# Altium PCB Rectifer.PcbDoc
Units mil, origin at the board's own origin, x right, y up, seen from the top; angles counter-clockwise.
Board outline 5250.03 x 3710.82 mil, 2 copper layers (Top Layer, Bottom Layer); 29 components, 18 nets, 77 pads, 1 vias.
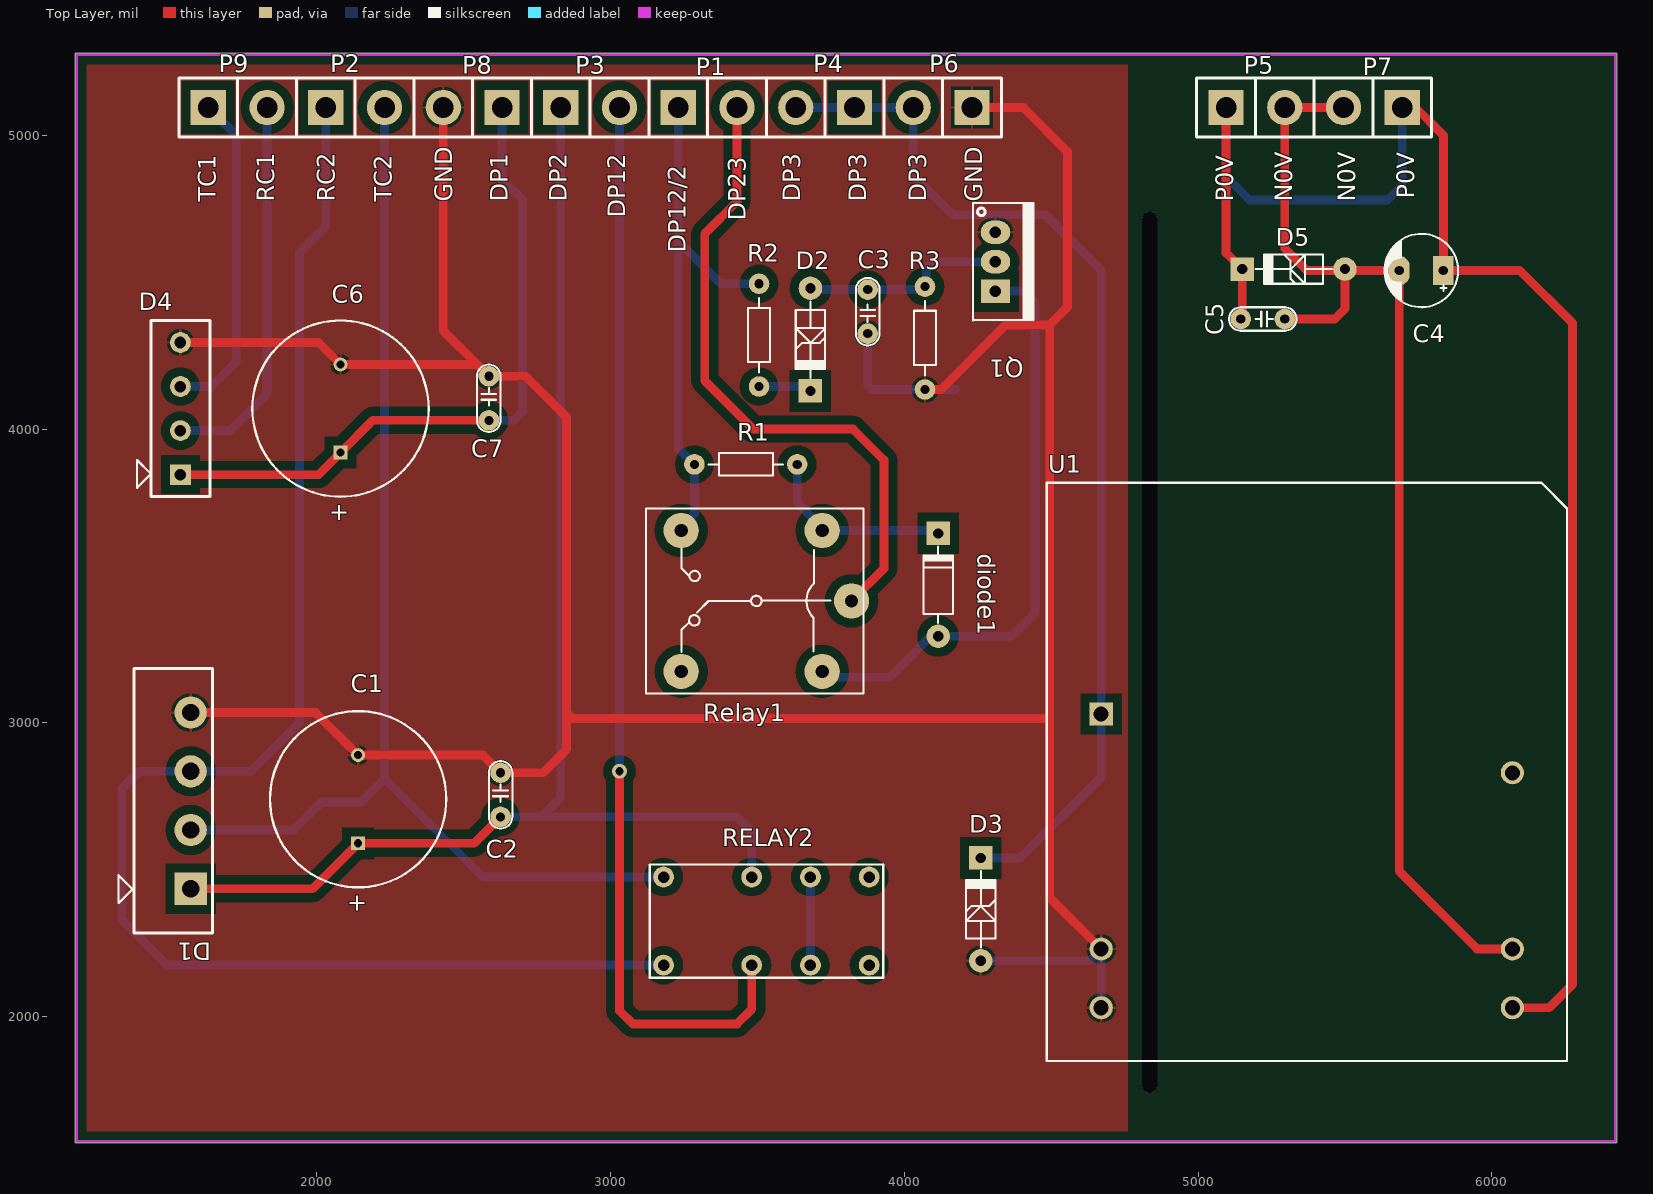
[diagram p0: Top Layer view]
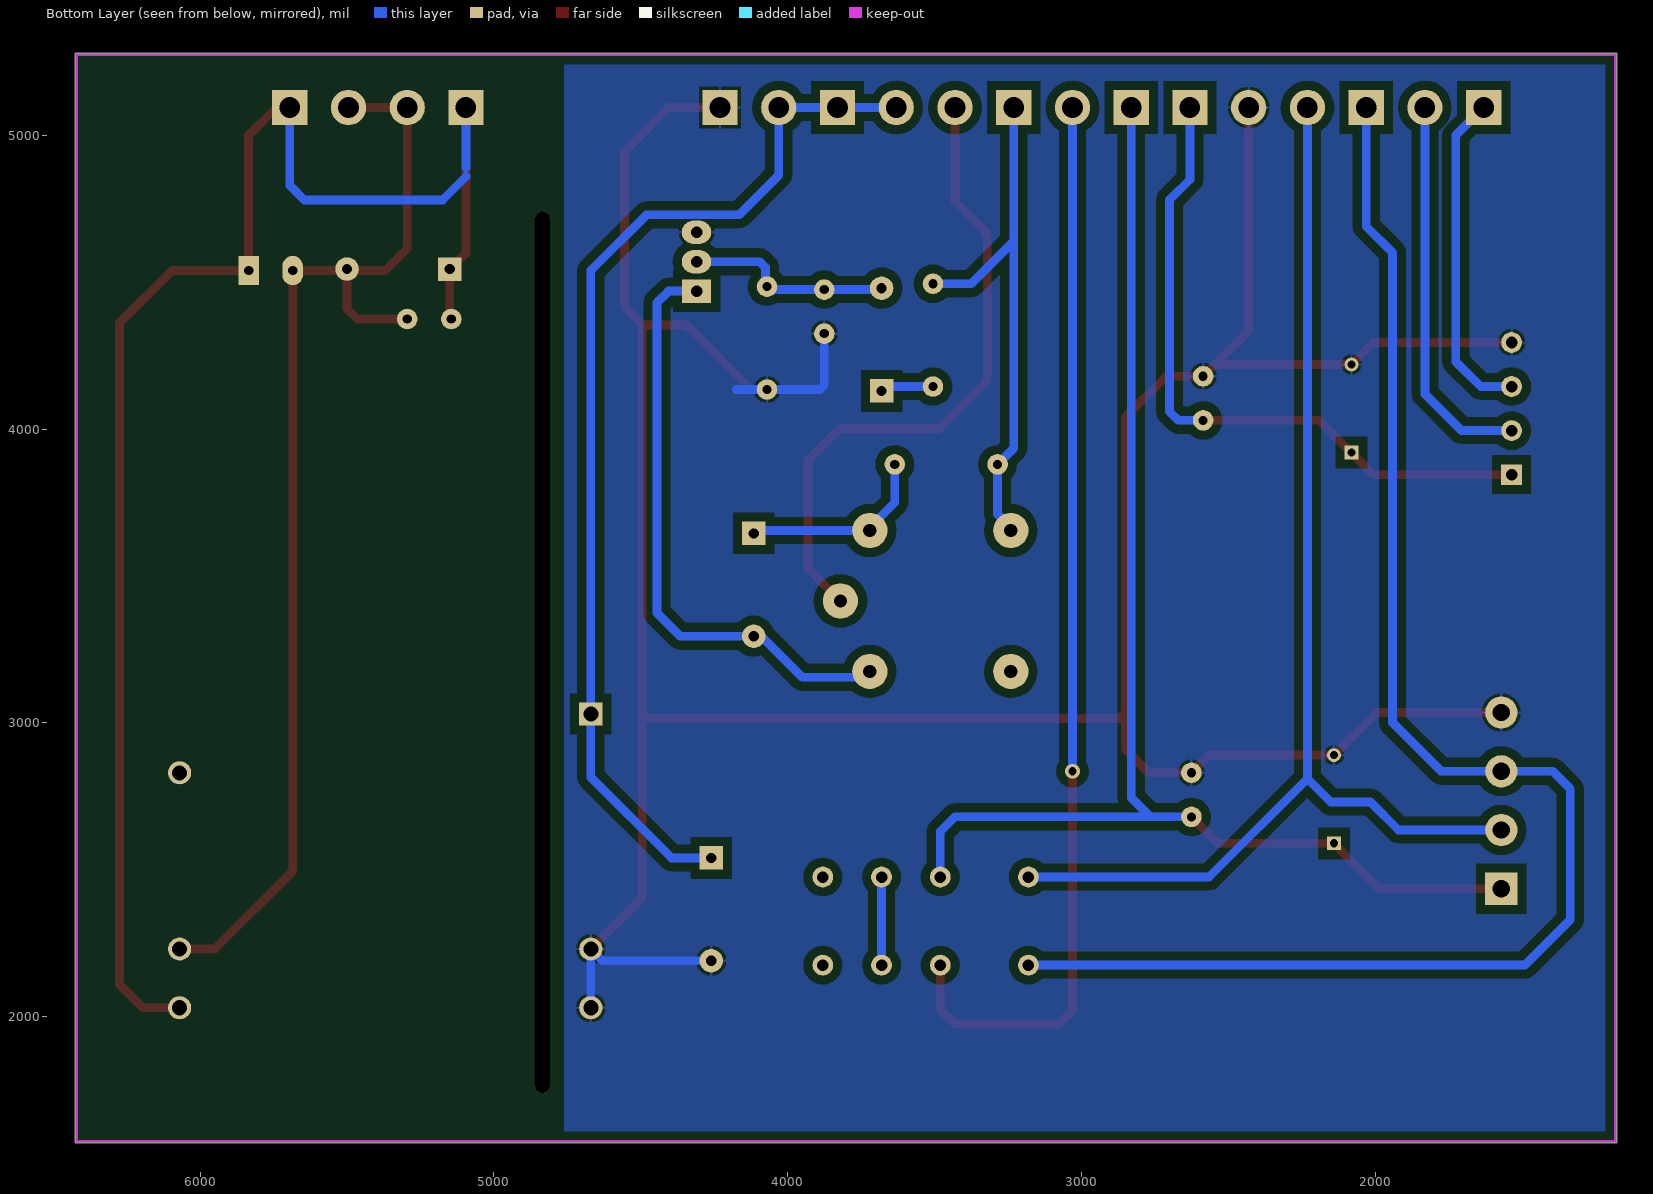
[diagram p1: Bottom Layer view, seen from below]

## Layer stack, top to bottom
Top Solder: solder mask 0.4, Solder Resist, Dk 3.5
Top Layer: signal copper 1.4
Dielectric 1: dielectric 12.6, FR-4, Dk 4.8
Bottom Layer: signal copper 1.4
Bottom Solder: solder mask 0.4, Solder Resist, Dk 3.5

## Board outline
1181.1,1569.79 cw(c1181.1,1574.8) 1176.09,1574.8 1176.09,5275.59 cw(c1181.1,5275.59) 1181.1,5280.61 6417.32,5280.61 cw(c6417.32,5275.59) 6419.21,5280.24 cw(c6421.1,5275.59) 6426.12,5275.59 6426.12,1574.8 cw(c6421.1,1574.8) 6419.21,1570.16 cw(c6417.32,1574.8) 6417.32,1569.79

## Design rules (kind name [scope] priority, off if disabled: settings)
Clearance [All] p1: gap=30
PolygonConnect [All] p1: connectstyle=Relief reliefconductorwidth=10 reliefentries=4 polygonreliefangle="90 Angle" airgapwidth=10
RoutingVias [All] p1: holewidth=28 width=50 viastyle="Through Hole" minholewidth=28 minwidth=50 maxholewidth=28 maxwidth=50
SolderMaskExpansion [All] p1: expansion=4
Width [All] p1: maxlimit=100 minlimit=10 preferedwidth=30
30 further rules are at their usual default settings.

## Components (designator, comment, footprint, x,y, rotation, side; value= is the part's Value field where it differs from the comment)
C1 "1000uF/25" RB7.6-15 2140,2740 r270 top
C2 "104" CN1.5 2625,2760 r270 top
C3 "104" CN1.5 3875,4395 r90 top
C4 "100uF/25" CP1.5/2.5 5835,4540 r180 top
C5 "104" CN1.5 5225,4375 r180 top
C6 "1000uF/25" RB7.6-15 2080,4070 r270 top
C7 "104" CN1.5 2585,4110 r270 top
D1 "Bridge2" KBU1010 1570,2435 r270 top
D2 "D Zener" DZ1A 3680,4480 r90 top
D3 "D Zener" DZ1A 4260,2190 r270 top
D4 "Bridge2" KBP206 1535,3845 r90 top
D5 "15V" DZ1A 5500,4545 r0 top
diode1 "Diode" D1A 4115,3295 r270 top
P1 "Header 2" "CON2 5.08" 3230,5095 r0 top
P2 "Header 2" "CON2 5.08" 2030,5095 r0 top
P3 "Header 2" "CON2 5.08" 2830,5095 r0 top
P4 "Header 2" "CON2 5.08" 3830,5095 r180 top
P5 "Header 2" "CON2 5.08" 5095,5095 r0 top
P6 "Header 2" "CON2 5.08" 4230,5095 r180 top
P7 "Header 2" "CON2 5.08" 5695,5095 r180 top
P8 "Header 2" "CON2 5.08" 2630,5095 r180 top
P9 "Header 2" "CON2 5.08" 1630,5095 r0 top
Q1 "MOSFET-N" QTO-220A 4310,4570 r270 top
R1 "Res1" R1/4W 3285,3880 r0 top
R2 "Res1" R1/4W 3505,4145 r90 top
R3 "Res1" R1/4W 4070,4135 r90 top
Relay1 "relay" RL_SPDT_10A 3820,3415 r180 top
RELAY2 "RY12W-K" RY-Series 3180,2175 r0 top
U1 "PP15" PP15 4670,3030 r0 top

## Footprints (in the part's own frame and the unit in brackets; to place one, negate y for a bottom-side part, rotate by r counter-clockwise, add the part's x,y. Pads: shape width x height; smd on the part's side, far side on the other; paste and mask are expansions set on the pad)
CN1.5 [mil]
  round 70 hole 31: 1(-70,0) 2(80,0)
  silkscreen extent -110,-40 120,40, body extent -110,-33 120,33, height 235
"CON2 5.08" [mil]
  rect 120x120 hole 70: 1(0,0)
  round 120 hole 70: 2(200,0)
  silkscreen extent -100,-100 300,100
CP1.5/2.5 [mil] "Tu hoa 33 >100 uF,50V, 220uF/16V,25V ( it su dung )"
  rect 70x100 hole 32: 1(0,0)
  oval 70x100 hole 32: 2(150,0)
  silkscreen extent -50,-125 200,125, body extent -46,-121 202,127, height 434
D1A [mil] "Diode 1A, W 100mil, L 350mil"
  round 80 hole 35: 1(0,0)
  rect 80x80 hole 35: 2(-350,0)
  silkscreen extent -305,-50 -45,50, body extent -386,-33 34,36, height 84
DZ1A [mil] "Diode 1A, W 100mil, L 350mil"
  round 80 hole 35: 1(0,0)
  rect 80x80 hole 35: 2(-350,0)
  silkscreen extent -305,-50 -45,50, body extent -346,-65 -15,40, height 121
KBP206 [mm]
  rect 1.8x1.8 hole 1: 1(0,0)
  round 1.8 hole 1: 2(3.81,0) 3(7.62,0) 4(11.43,0)
  silkscreen extent -1.91,-2.54 13.33,3.76, body extent -1.91,-2.54 13.31,2.54, height 12
KBU1010 [mil] "Bridge rectifier 10A"
  rect 110x110 hole 59.06: 1(0,0)
  round 110 hole 59.06: 2(-200,0) 3(-400,0) 4(-600,0)
  silkscreen extent -750,-246 150,75, body extent -750,-193 151,75, height 748
PP15 [mm]
  rect 2x2 hole 1.3: 1(0,0)
  round 2 hole 1.3: 2(0,-20.32) 3(0,-25.4) 4(35.56,-25.4) 5(35.56,-20.32) 6(35.56,-5.08)
  silkscreen extent -4.72,-30 40.28,20, body extent -4.14,-29.91 40.92,20.05, height 8
QTO-220A [mil] "TO-220 - 3-2-1"
  rect 80x100 hole 39: 1(100,0)
  oval 80x100 hole 39: 2(0,0) 3(-100,0)
  silkscreen extent -200,-76 200,131, body extent -195,-81 195,96, height 760
R1/4W [mil] "R 1/4W, 2 Pin, 350mil"
  round 70 hole 31: 1(0,0) 2(350,0)
  silkscreen extent 48,-38 302,38, body extent -40,-47 386,47, height 111
RB7.6-15 [mm] "Polarized Capacitor (Radial); 2 Leads"
  rect 1.2x1.2 hole 0.7: 1(3.81,0)
  round 1.2 hole 0.7: 2(-3.81,0)
  silkscreen extent -7.62,-7.62 7.62,7.62
RL_SPDT_10A [mil] "Relay SPDT, 5 pin, 10A,W 650mil, L 800mil, H 800mil"
  round 120 hole 45: 1(0,0) 2(580,240) 3(580,-240) 4(100,-240) 5(100,240)
  silkscreen extent -40,-315 700,315
RY-Series [mm]
  round 1.8 hole 1: 1(0,0) 2(7.62,0) 3(12.7,0) 4(17.78,0) 5(17.78,7.62) 6(12.7,7.62) 7(7.62,7.62) 8(0,7.62)
  silkscreen extent -1.2,-1.09 19,8.71, body extent -1.16,-1.04 19.06,8.76, height 12.5

## Part data
C1 C4 C6: library part "Cap Pol1", "Polarized Capacitor (Radial)"
C2 C3 C5 C7: library part Cap, "Capacitor"
D1 D4: "Diode Bridge"
D2 D3: "Zener Diode"
D5: library part "D Zener", "Zener Diode"
P1 P2 P3 P4 P5 P6 P7 P8 P9: "Header, 2-Pin"
Q1: "N-Channel MOSFET"
R1 R2 R3: "Resistor"
Relay1: library part Relay, "SPDT Relay"

## Free pads (board coordinates)
  oval 50x3000 hole 50 slot 3000 at 90 deg unplated: 2(4835,3240)

## Via types
v1: diameter 50, hole 28, Top Layer to Bottom Layer, 1 vias

## Nets (pads, with @x,y where several pads share a name; then routed paths per layer and width w, separated by ;. In a path a pad name is that pad's centre, name@x,y a point inside that pad or via, vN(x,y) a via of type N, cw(c..) or ccw(c..) an arc to the next point about the centre after c; other vN are vias at no path point)
DP1: C6.1 C7.2 D4.1 P8.1 | length 2318.1
  Top Layer w30: D4.1 2005,3845 C6.1 2190,4030 C7.2
  Bottom Layer w30: C7.2 2670,4030 2700,4060 2700,4780 2630,4850 P8.1
DP2: C1.1 C2.2 D1.1 P3.1 RELAY2.7 | length 4629.1
  Top Layer w30: D1.1 1985,2435 C1.1 2535,2590 C2.2
  Bottom Layer w30: C2.2 2765,2680 ; P3.1 2830,2745 2765,2680 ; RELAY2.7 3480,2630 3430,2680 2765,2680
DP3: D3.2 P4.1 P4.2 P6.2 U1.1 | length 3653.5
  Bottom Layer w30: P4.2 P4.1 P6.2 4030,4865 4165,4730 4480,4730 4670,4540 U1.1 4670,2815 4395,2540 D3.2
DP12: P3.2 RELAY2.2 | length 3714.4
  Top Layer w30: v1(3030,2835) 3030,2020 3075,1975 3430,1975 3480,2025 RELAY2.2
  Bottom Layer w30: v1(3030,2835) P3.2
DP12/2: P1.1 R1.1 R2.2 Relay1.3 | length 1820.6
  Bottom Layer w30: Relay1.3@3230,3655 3285,3710 R1.1 3230,3935 3230,3970 3230,4565 3230,4640 ; P1.1 3230,4640 ; R2.2 3375,4495 3230,4640
DP23: P1.2 Relay1.1 | length 2223
  Top Layer w30: P1.2 3430,4775 3320,4665 3320,4165 3485,4000 3825,4000 3930,3895 3930,3525 Relay1.1
GND: C1.2 C2.1 C3.1 C6.2 C7.1 D1.4 D3.1 D4.4 P6.1 P8.2 Q1.3 R3.1 U1.2 U1.3 | length 11348
  Top Layer w30: D4.4 2005,4295 C6.2 2545,4220 ; D1.4 1995,3035 C1.2 2565,2890 C2.1 2770,2830 2850,2910 2850,3035 ; P8.2 2430,4335 2545,4220 ; R3.1 4125,4135 4345,4355 4495,4355 ; P6.1 4405,5095 4555,4945 4555,4415 4495,4355 ; U1.2 4495,2405 4495,3015 ; 2545,4220 C7.1 2710,4180 2850,4040 2850,3035 ; 2850,3035 2870,3015 4495,3015 ; 4495,3015 4495,4355
  Bottom Layer w30: C3.1 3875,4150 3890,4135 R3.1 4175,4135 ; D3.1 4630,2190 U1.2 U1.3
N0V: C4.2 C5.1 D5.1 P5.2 P7.2 U1.5 | length 3995.3
  Top Layer w30: C5.1 5465,4375 5500,4410 D5.1@5500,4540 ; P7.2 P5.2 5295,4615 5370,4540 D5.1@5500,4540 ; D5.1 D5.1@5500,4540 ; U1.5 5950,2230 5685,2495 C4.2 D5.1@5500,4540
NetC3_2: C3.2 D2.1 Q1.2 R3.2 | length 708.3
  Bottom Layer w30: D2.1@3685,4475 C3.2 4075,4475 4075,4550 4095,4570 Q1.2
NetD2_2: D2.2 R2.1 | length 160
  Bottom Layer w30: R2.1 D2.2@3665,4145
Netdiode1_1: diode1.1 Q1.1 Relay1.5 | length 2012.7
  Bottom Layer w30: Relay1.5@3730,3155 3950,3155 4090,3295 4365,3295 4445,3375 4445,4430 4405,4470 Q1.1
Netdiode1_2: diode1.2 R1.2 Relay1.4 | length 624.4
  Bottom Layer w30: R1.2 3635,3750 3730,3655 diode1.2@4090,3655
NetRELAY2_3: RELAY2.3 RELAY2.6 | length 300
  Bottom Layer w30: RELAY2.3 RELAY2.6
P0V: C4.1 C5.2 D5.2 P5.1 P7.1 U1.4 | length 5505.7
  Top Layer w30: P5.1 5095,4600 D5.2 5150,4380 C5.2 ; P7.1 5740,5095 5835,5000 C4.1 6095,4540 6275,4360 6275,2110 6195,2030 U1.4
  Bottom Layer w30: 5095,4860 5175,4780 5645,4780 5695,4830 ; 5095,4890 P5.1 ; 5695,4835 P7.1
RC1: D4.2 P9.2 | length 1321.8
  Bottom Layer w30: D4.2 1705,3995 1830,4120 P9.2
RC2: D1.3 P2.1 RELAY2.1 | length 5184.7
  Bottom Layer w30: P2.1 2030,4690 1940,4600 1940,3000 1775,2835 D1.3 1395,2835 1335,2775 1335,2330 1490,2175 RELAY2.1
TC1: D4.3 P9.1 | length 1129.6
  Bottom Layer w30: D4.3 1640,4145 1725,4230 1725,5000 P9.1
TC2: D1.2 P2.2 RELAY2.8 | length 4106.2
  Bottom Layer w30: D1.2 1920,2635 2015,2730 2150,2730 2230,2810 ; P2.2 2230,2810 ; RELAY2.8 2565,2475 2230,2810
pads on no net: Relay1.2 RELAY2.4 RELAY2.5 U1.6

## Polygon pours and split planes (outlines as drawn)
GND on Top Layer "GND_L01_P000" (solid, remove dead copper, pour order 0): 1181.1,5275.59 1186.69,5270 4760,5270 4760,1579.8 4755,1574.8 1181.1,1574.8
GND on Bottom Layer "GND_L02_P002" (solid, remove dead copper, pour order 2): 1181.1,5275.59 1186.69,5270 4760,5270 4760,1579.8 4755,1574.8 1181.1,1574.8

## Keep-outs
Keep-Out Layer:
  lines w10: 6417.32,1574.8 1181.1,1574.8 1181.1,5275.59 6417.32,5275.59 ; 6421.1,1574.8 6421.1,5275.59

## Silkscreen, mask and mechanical layers (free items; w line width, h text height)
Top Overlay:
  text "P0V" at 5735,4785 h60 r90
  text "TC1" at 1655,4775 h60 r90
  text "RC1" at 1855,4775 h60 r90
  text "RC2" at 2060,4775 h60 r90
  text "TC2" at 2255,4775 h60 r90
  text "GND" at 2460,4775 h60 r90
  text "DP1" at 2650,4775 h60 r90
  text "DP2" at 2850,4775 h60 r90
  text "DP3" at 3645,4775 h60 r90
  text "DP3" at 3870,4775 h60 r90
  text "DP3" at 4075,4775 h60 r90
  text "GND" at 4265,4775 h60 r90
  text "P0V" at 5120,4775 h60 r90
  text "N0V" at 5320,4775 h60 r90
  text "N0V" at 5535,4775 h60 r90
  text "DP12" at 3050,4720 h60 r90
  text "DP23" at 3460,4710 h60 r90
  text "DP12/2" at 3255,4600 h60 r90

## Text inside footprints (layer, text, board x,y; h text height)
C1: Top Overlay "+" at 2110.99,2419.85 h59.06 r270
C6: Top Overlay "+" at 2050.99,3749.85 h59.06 r270